# EAGLE board auduino (EAGLE 6.1)
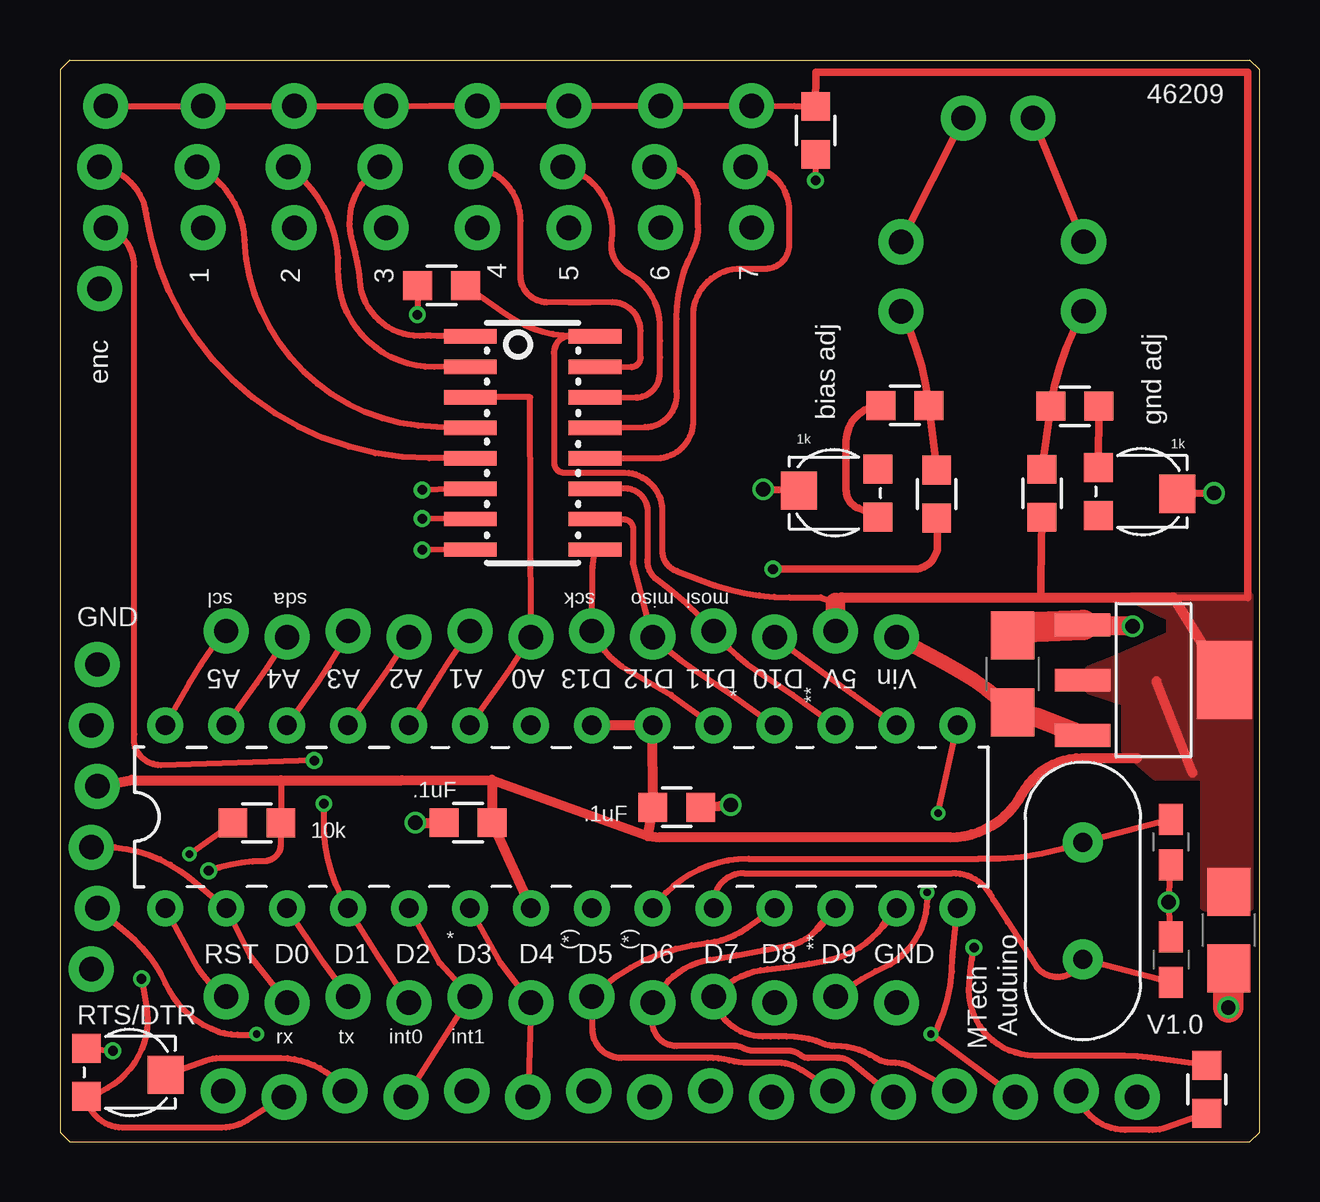
[diagram p0: board, top side]
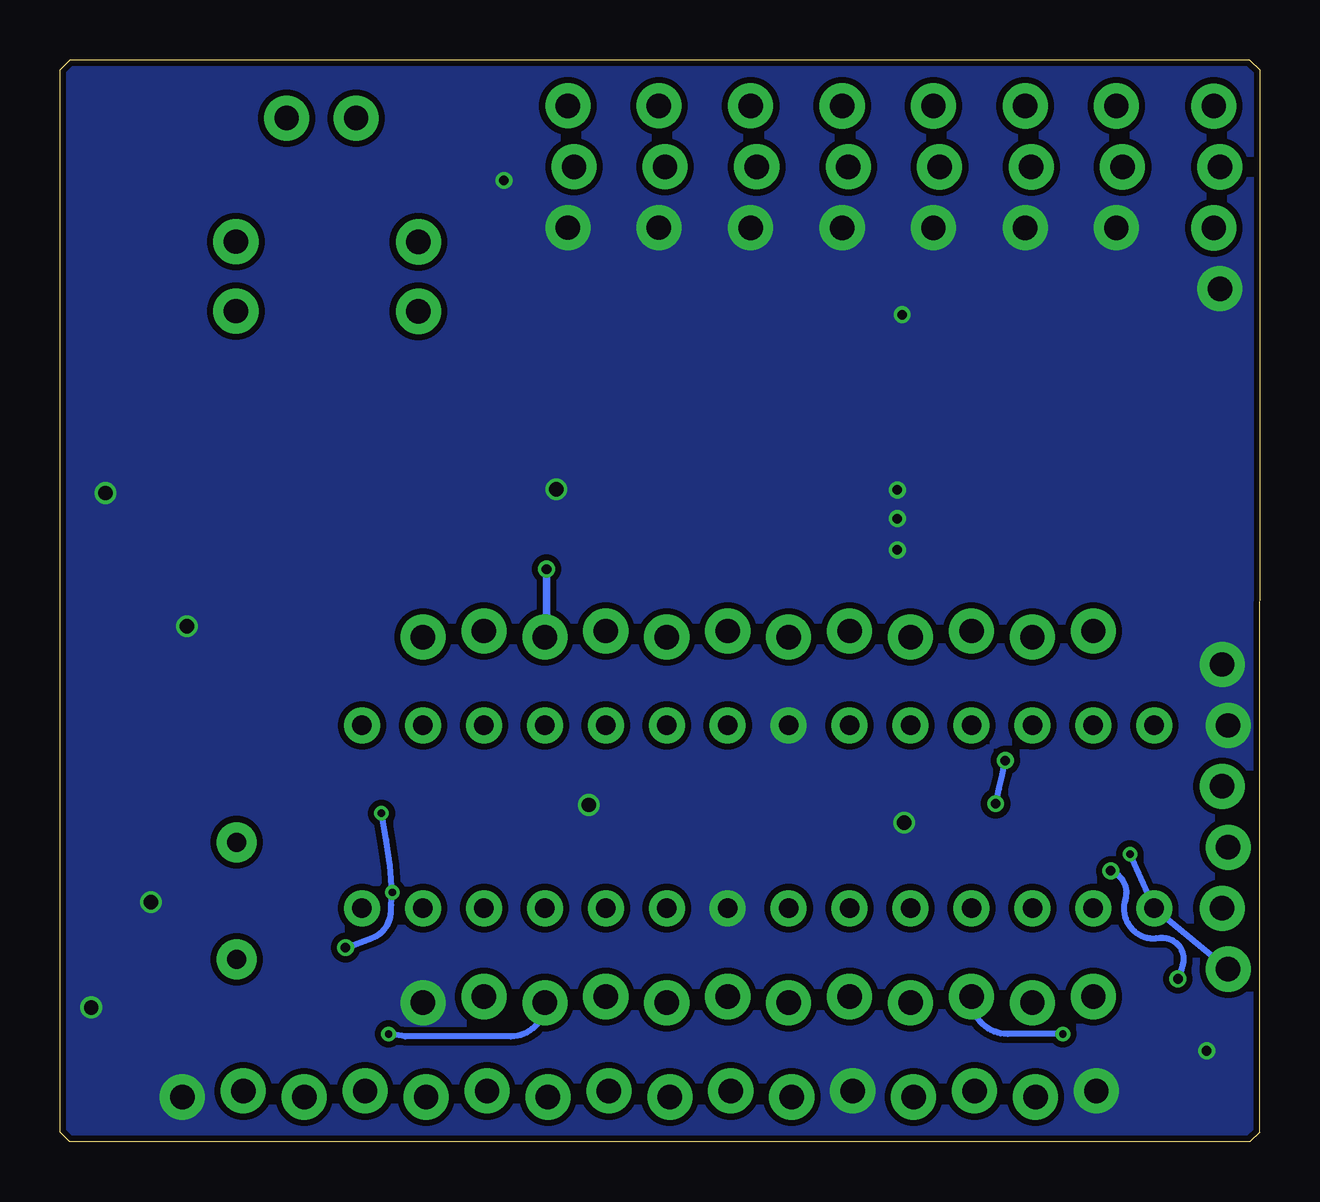
[diagram p1: board, bottom side, seen from below]

Size 50 x 45.1 mm. Coordinates in mm from the lower left corner, seen from the top.
Outline: 0,0.4 0,44.7 0.4,45.1 49.6,45.1 50,44.7 50,0.4
Outline: 0.4,0 0.4,0
Outline: 0.4,0 49.6,0
Outline: 50,0.4 50,0.4
Outline: 49.6,0 50,0.4
Outline: 0,0.4 0.4,0
Copper layers (1*16): Top 0.035mm / dielectric 1.5mm / Bottom 0.035mm
Design rules: minimum track width 6mil, minimum drill 12mil, track to track 6mil, track to pad 6mil, pad to pad 6mil, via to via 6mil, smd to smd 0mil, copper to edge 10mil, drill to drill 10mil, minimum pad ring 10mil, minimum via ring 6mil, stop-mask expansion 2mil, vias tented up to drill 100mil, thermal gap 10mil

## Footprints (pad centres in the part's own frame; a part is rotated, then mirrored left to right if it is on the bottom)
ZLDO1117 = smd 0.95 x 2.3: 1 -2.3,-3; 2 0,-3; 3 2.3,-3 | smd 3.25 x 2.3: 4 0,2.9
0603-CAP = smd 1.3 x 1: 1 -0.95,0; 2 0.95,0
0805 = smd 1.2 x 1.2: 1 -1,0; 2 1,0
1206 = smd 2 x 1.8: 1 -1.6,0; 2 1.6,0
DIL28-3 = drill 0.813 pad 1.5: 1 -16.51,-3.81; 2 -13.97,-3.81; 3 -11.43,-3.81; 4 -8.89,-3.81; 5 -6.35,-3.81; 6 -3.81,-3.81; 7 -1.27,-3.81; 8 1.27,-3.81; 9 3.81,-3.81; 10 6.35,-3.81; 11 8.89,-3.81; 12 11.43,-3.81; 13 13.97,-3.81; 14 16.51,-3.81; 15 16.51,3.81; 16 13.97,3.81; 17 11.43,3.81; 18 8.89,3.81; 19 6.35,3.81; 20 3.81,3.81; 21 1.27,3.81; 22 -1.27,3.81; 23 -3.81,3.81; 24 -6.35,3.81; 25 -8.89,3.81; 26 -11.43,3.81; 27 -13.97,3.81; 28 -16.51,3.81
1X06_LOCK = drill 1.016 pad 1.88: 1 0,0.127; 2 2.54,-0.127; 3 5.08,0.127; 4 7.62,-0.127; 5 10.16,0.127; 6 12.7,-0.127
1X16_LOCK = drill 1.016 pad 1.88: 1 0,0.127; 2 2.54,-0.127; 3 5.08,0.127; 4 7.62,-0.127; 5 10.16,0.127; 6 12.7,-0.127; 7 15.24,0.127; 8 17.78,-0.127; 9 20.32,0.127; 10 22.86,-0.127; 11 25.4,0.127; 12 27.94,-0.127; 13 30.48,0.127; 14 33.02,-0.127; 15 35.56,0.127; 16 38.1,-0.127
1X04_LOCK = drill 1.016 pad 1.88: 1 0,0.127; 2 2.54,-0.127; 3 5.08,0.127; 4 7.62,-0.127
1X03_LOCK = drill 1.016 pad 1.88: 1 0,0.127; 2 2.54,-0.127; 3 5.08,0.127
1X02_LOCK = drill 1.016 pad 1.88: 1 -0.178,0; 2 2.718,0
HC49US = drill 0.8 pad 1.676: 1 -2.44,0; 2 2.44,0
1X12_LOCK = drill 1.016 pad 1.88: 1 0,0.127; 2 2.54,-0.127; 3 5.08,0.127; 4 7.62,-0.127; 5 10.16,0.127; 6 12.7,-0.127; 7 15.24,0.127; 8 17.78,-0.127; 9 20.32,0.127; 10 22.86,-0.127; 11 25.4,0.127; 12 27.94,-0.127
TC33X-2 = smd 1.2 x 1.2: 1 -1,-1.8; 3 1,-1.8 | smd 1.6 x 1.5: 2 0.1,1.5
SO16 = smd 0.6 x 2.2: 1 -4.445,-2.6; 2 -3.175,-2.6; 3 -1.905,-2.6; 4 -0.635,-2.6; 5 0.635,-2.6; 6 1.905,-2.6; 7 3.175,-2.6; 8 4.445,-2.6; 9 4.445,2.6; 10 3.175,2.6; 11 1.905,2.6; 12 0.635,2.6; 13 -0.635,2.6; 14 -1.905,2.6; 15 -3.175,2.6; 16 -4.445,2.6

## Placement (x,y rotation side)
5V  ZLDO1117  [ZLDO1117]  45.63,19.25 270 top
C1  18pF  [0603-CAP]  46.31,12.5 90 top
C2  .1uF  [0805]  25.71,13.95 180 top
C3  18pF  [0603-CAP]  46.31,7.6 270 top
C4  .1uF  [0805]  17.01,13.31 180 top
C5  10uF  [1206]  48.71,8.83 270 top
C6  .1 uF  [0805]  31.5,42.16 90 top
C7  .1 uF  [0805]  15.9,35.7 180 top
C8  10uF  [1206]  39.71,19.5 90 top
IC1  [DIL28-3]  20.9,13.55 0 top
JP1  [1X06_LOCK]  1.43,7.2 90 top
JP2  M16_LOCK  [1X16_LOCK]  6.8,2 0 top
JP3  [1X04_LOCK]  1.78,43.18 270 top
JP4  [1X03_LOCK]  5.84,43.18 270 top
JP5  [1X03_LOCK]  9.64,43.18 270 top
JP6  [1X03_LOCK]  13.47,43.18 270 top
JP7  [1X03_LOCK]  17.27,43.18 270 top
JP8  [1X03_LOCK]  21.09,43.19 270 top
JP9  [1X03_LOCK]  24.91,43.19 270 top
JP10  [1X03_LOCK]  28.7,43.19 270 top
JP11  [1X02_LOCK]  35.06,34.8 90 top
JP12  [1X02_LOCK]  42.67,37.35 270 top
JP13  [1X02_LOCK]  37.84,42.68 0 top
R1  10k  [0805]  8.21,13.3 180 top
R2  100  [0805]  47.8,2.2 90 top
R3  10k  [0805]  40.93,27.04 270 top
R4  1k  [0805]  42.31,30.67 180 top
R5  10k  [0805]  36.54,27 270 top
R6  1k  [0805]  35.22,30.7 0 top
U$1  HC49US  [HC49US]  42.63,10.05 270 top
U$2  M12  [1X12_LOCK]  6.93,5.93 0 top
U$3  TRIMPOTTC33X-2  [TC33X-2]  2.9,2.9 270 top
U$4  NXP|HEF4051BTD  [SO16]  19.7,29.14 270 top
U$5  M12  [1X12_LOCK]  6.93,21.17 0 top
U$6  TRIMPOTTC33X-2  [TC33X-2]  45.08,27.11 270 top
U$7  TRIMPOTTC33X-2  [TC33X-2]  32.3,27.05 90 top

## Library data of the parts
5V C1-C8 IC1 JP1-JP13 R1-R6 U$1-U$7 = 1dah

## Nets
0V5: JP12.2 R3.1 R4.2
1/10: JP11.1 R5.1 R6.2
5V: 5V.2 5V.4 C2.2 C4.1 C5.1 C6.2 C7.1 IC1.7 IC1.20 IC1.21 JP1.4 JP2.2 JP3.1 JP4.1 JP5.1 JP6.1 JP7.1 JP8.1 JP9.1 JP10.1 R1.1 R3.2 U$3.3 U$4.16 U$5.11
A0: IC1.23 U$4.3 U$5.6
A1: IC1.24 U$5.5
A2: IC1.25 U$5.4
A3: IC1.26 U$5.3
A4: IC1.27 U$5.2
A5: IC1.28 U$5.1
CONTRAST: JP2.3 U$3.2
D0: IC1.2 JP1.3 U$2.2
D1: IC1.3 JP1.2 U$2.3
D2: IC1.4 JP3.3 U$2.4
D3: IC1.5 JP2.4 U$2.5
D4: IC1.6 JP2.6 U$2.6
D5: IC1.11 JP2.11 U$2.7
D6: IC1.12 JP2.12 U$2.8
D7: IC1.13 JP2.13 U$2.9
D8: IC1.14 JP2.14 U$2.10
D9: IC1.15 R2.2 U$2.11
D10: IC1.16 R5.2 U$5.10
D11: IC1.17 U$4.11 U$5.9
D12: IC1.18 U$4.10 U$5.8
D13: IC1.19 U$4.9 U$5.7
GND: 5V.1 C1.1 C2.1 C3.1 C4.2 C5.2 C6.1 C7.2 C8.2 IC1.8 IC1.22 JP1.5 JP1.6 JP2.1 JP2.5 JP2.16 JP3.4 JP4.3 JP5.3 JP6.3 JP7.3 JP8.3 JP9.3 JP10.3 U$2.12 U$3.1 U$4.6 U$4.7 U$4.8 U$6.2 U$7.2
LED+: JP2.15 R2.1
N$1: R6.1 U$7.1
N$2: JP3.2 U$4.5
N$3: JP4.2 U$4.4
N$4: JP5.2 U$4.2
N$5: JP6.2 U$4.1
N$6: JP7.2 U$4.15
N$7: JP8.2 U$4.14
N$8: JP9.2 U$4.13
N$9: JP10.2 U$4.12
N$10: R4.1 U$6.1
N$11: JP12.1 JP13.2
N$12: JP11.2 JP13.1
RESET: IC1.1 JP1.1 R1.2 U$2.1
VIN: 5V.3 C8.1 U$5.12
XTAL_N: C3.2 IC1.10 U$1.2
XTAL_P: C1.2 IC1.9 U$1.1

## Tracks (layer width: path | path; a pad name or v marks a point on that pad's centre or on a via)
0V5
  Top 0.305: R3.1 R4.2 arc-22 JP12.2
1/10
  Top 0.305: R5.1 R6.2 arc20 JP11.1
5V  (via drill 0.4)
  Top 0.254: 9.21,15.08 R1.1 9.2,12.4 arc-90 8.5,11.7 arc20 v6.2,11.3 | v3.4,6.8 3.6,5.7 arc-87 U$3.3 arc82 2.6,0.6 6.6,0.6 arc36 7.8,0.9 JP2.2 | JP3.1 JP4.1 JP5.1 JP6.1 15.4,43.18 JP7.1 JP8.1 JP9.1 JP10.1 arc-1 C6.2 | C7.1 18.6,34.5 arc35 21.4,33.6 arc-1 U$4.16 21.3,33.6 arc100 20.6,32.8 20.6,28.3 arc90 21,27.9 23.4,27.9 arc-96 25.1,26.2 25.1,24.7 arc74 25.7,23.8 27.3,23.2 arc18 30.4,22.7 31.7,22.7 32.33,22.49 | 46.4,22.7 49.5,22.7
  Top 0.305: 49.5,22.7 49.5,44.6 31.5,44.6 C6.2 | R3.2 40.89,23.37 arc2 40.89,22.7
  Top 0.406: 18.01,15.1 14.24,15.08 9.21,15.08 3.12,15.08 3,15.1 JP1.4 | 18.01,15.1 C4.1 IC1.7 | IC1.21 IC1.20 C2.2 24.51,12.75 | 18.01,15.1 24.51,12.75 | 32.33,22.49 arc-53 32.58,22.7 40.89,22.7 46.4,22.7 5V.4 | 24.51,12.75 25,12.7 37.1,12.7 arc62 40.1,14.5 arc-62 42.6,16 44.9,16 | 47.2,15.4 45.7,19.2
  Top 0.813: 32.33,22.49 U$5.11
  Bottom 0.254: v6.2,11.3 arc87 5.6,10.1 arc-117 4.2,8.5 arc114 3.2,7.4 arc7 v3.4,6.8
  pour Top (no thermals): 44.16,20.16 42.89,19.65 42.89,18.89 44.42,18.39 44.42,16.36 45.68,15.28 47.71,15.28 47.71,9.83 49.59,9.83 49.59,22.7 44.66,22.7 46.31,21.9 46.31,21.1
A0
  Top 0.254: IC1.23 18.36,19.14 arc4 U$5.6 19.6,31.04 U$4.3
A1
  Top 0.254: IC1.24 15.82,19.39 arc-3 U$5.5
A2
  Top 0.254: IC1.25 13.28,19.14 arc4 U$5.4
A3
  Top 0.254: IC1.26 10.74,19.14 arc10 U$5.3
A4
  Top 0.254: IC1.27 8.2,19.14 arc4 U$5.2
A5
  Top 0.254: IC1.28 5.4,19.14 arc-11 U$5.1
CONTRAST
  Top 0.254: U$3.2 6.1,3.4 arc-23 6.8,3.5 9.2,3.5 arc-54 JP2.3
D0
  Top 0.254: U$2.2 7.94,7.71 IC1.2 5.4,11 arc44 JP1.3
D1  (via drill 0.3)
  Top 0.254: IC1.3 10.99,7.46 U$2.3 | JP1.2 2.8,8.7 arc-25 4.4,6.6 arc46 6.6,4.6 arc24 v8.2,4.5
  Bottom 0.254: v8.2,4.5 10.5,4.5 arc92 U$2.3
D2  (via drill 0.4)
  Top 0.254: U$2.4 13.28,7.71 IC1.4 arc-33 11,13.4 arc2 v11,14.1 | v10.6,15.9 4.2,15.7 arc-100 3.1,17 3.1,36.5 arc73 JP3.3
  Bottom 0.254: v11,14.1 arc-2 v10.6,15.9
D3
  Top 0.254: IC1.5 15.82,7.46 U$2.5 JP2.4
D4
  Top 0.254: IC1.6 18.36,7.46 U$2.6 JP2.6
D5
  Top 0.254: IC1.11 28.6,8.9 arc-30 27,8.3 arc38 U$2.7 arc-3 22.2,4.7 arc90 23.4,3.5 27,3.5 arc-16 27.9,3.4 arc14 28.7,3.3 29.8,3.3 arc-37 30.9,3 JP2.11
D6
  Top 0.254: 31.6,8.9 arc-38 30.4,8.2 arc-2 27.1,7.6 arc55 U$2.8 arc1 24.7,5 arc90 25.7,4 28.1,4 arc-28 28.5,3.9 arc28 28.9,3.8 30.4,3.8 arc-30 30.9,3.6 arc37 31.2,3.5 32.4,3.5 arc-42 33,3.3 JP2.12
  Top 0.305: 31.6,8.9 IC1.12
D7
  Top 0.254: 34.3,9 arc-40 32.1,7.6 arc-7 29.5,7.2 arc44 U$2.9 arc79 29.3,4.4 arc-1 30.3,4.4 arc-22 31.8,4.1 arc22 32.3,4 arc-32 34,3.5 arc33 34.7,3.3 arc-29 35.5,3.1 JP2.13
  Top 0.305: 34.3,9 IC1.13
D8  (via drill 0.3)
  Top 0.254: IC1.14 37.2,7.7 arc-24 36.6,4.8 arc-65 v36.3,4.5 JP2.14
  Bottom 0.254: v36.3,4.5 35.6,4.4 31.2,4.4 arc-90 U$2.10
D9  (via drill 0.3, 0.4)
  Top 0.254: v36.6,13.7 IC1.15 | v36.15,10.4 arc-64 34.6,7.4 arc13 U$2.11 | R2.2 45.5,3.5 arc8 43.8,3.6 arc-1 40.6,3.6 arc-95 37.9,6.6 arc-5 v38.1,8.1
  Bottom 0.254: v36.6,13.7 arc8 v36.15,10.4 arc-3 36.2,9.6 arc68 37,8.5 v38.1,8.1
D10  (via drill 0.4)
  Top 0.254: IC1.16 33.09,18.63 arc-1 U$5.10
  Top 0.305: R5.2 36.58,24.89 arc-94 35.56,23.88 v29.72,23.88
  Bottom 0.305: v29.72,23.88 29.72,21.59 arc15 U$5.10
D11
  Top 0.254: IC1.17 30.55,18.63 29.03,19.65 arc-18 U$5.9 arc13 24.8,23.5 arc-54 24.5,24.34 24.5,26.34 arc90 23.5,27.24 arc0 U$4.11
D12
  Top 0.254: IC1.18 28.01,18.63 26.49,19.65 arc-9 U$5.8 23.9,24.04 arc-24 23.9,24.24 23.9,25.54 arc103 23.4,25.94 arc-28 U$4.10
D13
  Top 0.254: IC1.19 25.47,18.63 23.69,19.65 arc-35 U$5.7 22.2,23.94 U$4.9
GND  (via drill 0.4, 0.6)
  Top 0.254: C1.1 v46.21,10 C3.1 | U$3.1 v2.2,3.8 | C6.1 v31.5,40.08 | C7.2 v14.9,34.48 | U$4.6 v15.1,27.18 | U$4.7 v15.1,25.98 | U$4.8 v15.1,24.68
  Top 0.305: v29.31,27.2 U$7.2 | v48.11,27.05 U$6.2
  Top 0.406: v14.81,13.31 C4.2 | C2.1 v27.96,14.05
  Top 0.813: 5V.1 v44.71,21.5
  Top 1.27: 5V.1 40.2,21.45 C8.2 | C5.2 48.7,7.17 v48.7,5.61
  pour Bottom (isolate 0.254, no thermals): -5.08,-7.62 62.23,-7.62 62.33,55.59 -4.98,55.59
LED+
  Top 0.254: R2.1 46.1,0.6 arc-23 45.4,0.5 44.4,0.5 arc-77 JP2.15
N$1
  Top 0.305: U$7.1 33.27,26.42 arc-65 32.77,27.18 arc-2 32.77,29.21 arc-86 R6.1
N$2
  Top 0.254: U$4.5 15.4,28.5 arc-82 3.6,38.7 arc74 JP3.2
N$3
  Top 0.254: U$4.4 15.7,29.8 arc-86 7.7,37.6 arc61 JP4.2
N$4
  Top 0.254: U$4.2 15.6,32.3 arc-92 11.6,36.4 arc56 JP5.2
N$5
  Top 0.254: U$4.1 15.7,33.6 arc1 15,33.6 arc-87 12.5,35.9 arc13 12.2,37.5 arc-74 JP6.2
N$6
  Top 0.254: U$4.15 23.8,32.3 arc91 24.2,32.7 arc-1 24.2,33.8 arc91 23,35 arc-1 20.3,35 arc-89 19.2,36.1 arc-1 19.2,38.4 arc86 JP7.2
N$7
  Top 0.254: U$4.14 23.99,31.03 arc89 25,32 arc4 25,34.1 arc60 23.7,36.2 arc-70 23,37.6 arc85 JP8.2
N$8
  Top 0.254: U$4.13 24.4,29.8 arc97 25.7,31.3 25.7,34.3 arc-27 26.4,37.2 arc32 26.6,38.2 26.6,39.1 arc99 JP9.2
N$9
  Top 0.254: U$4.12 24.9,28.5 arc90 26.4,30.1 arc0 26.4,34.5 arc-90 28.4,36.4 arc0 29.4,36.4 arc90 30.4,37.4 arc0 30.4,38.8 arc93 JP10.2
N$10
  Top 0.305: U$6.1 R4.1
N$11
  Top 0.305: JP12.1 JP13.2
N$12
  Top 0.305: JP11.2 JP13.1
RESET  (via drill 0.3)
  Top 0.254: IC1.1 5.6,7.5 arc29 U$2.1 | v5.4,12 R1.2
  Bottom 0.254: JP1.1 IC1.1 v5.4,12
VIN
  Top 0.61: U$5.12 36.8,20 arc-19 C8.1
  Top 0.813: C8.1 40.71,17.7 5V.3
XTAL_N
  Top 0.254: C3.2 U$1.2 arc-120 40.7,7.3 arc2 38.9,10.1 arc66 37.2,11.2 28.5,11.2 arc99 IC1.10
XTAL_P
  Top 0.254: C1.2 U$1.1 arc-23 38.3,11.8 28.7,11.8 arc55 IC1.9

## Text on the board
tPlace: 46209 | 1 | 2 | 3 | 4 | 5 | 6 | 7 | enc | bias adj | gnd adj | 1k | 1k | scl | sda | sck | miso | mosi | GND | A5 | A4 | A3 | A2 | A1 | A0 | D13 | D12 | D11 | D10 | 5V | Vin | * | ** | * | (*) | (*) | ** | RST | D0 | D1 | D2 | D3 | D4 | D5 | D6 | D7 | D8 | D9 | GND | RTS/DTR | V1.0 | rx | tx | int0 | int1 | MTech | Auduino